# Altium PCB rpi-can-hat.PcbDoc
Units mil, origin at the board's own origin, x right, y up, seen from the top; angles counter-clockwise.
Board outline 2559.06 x 1885.67 mil, 2 copper layers (Top Layer, Bottom Layer); 25 components, 28 nets, 131 pads, 11 vias.
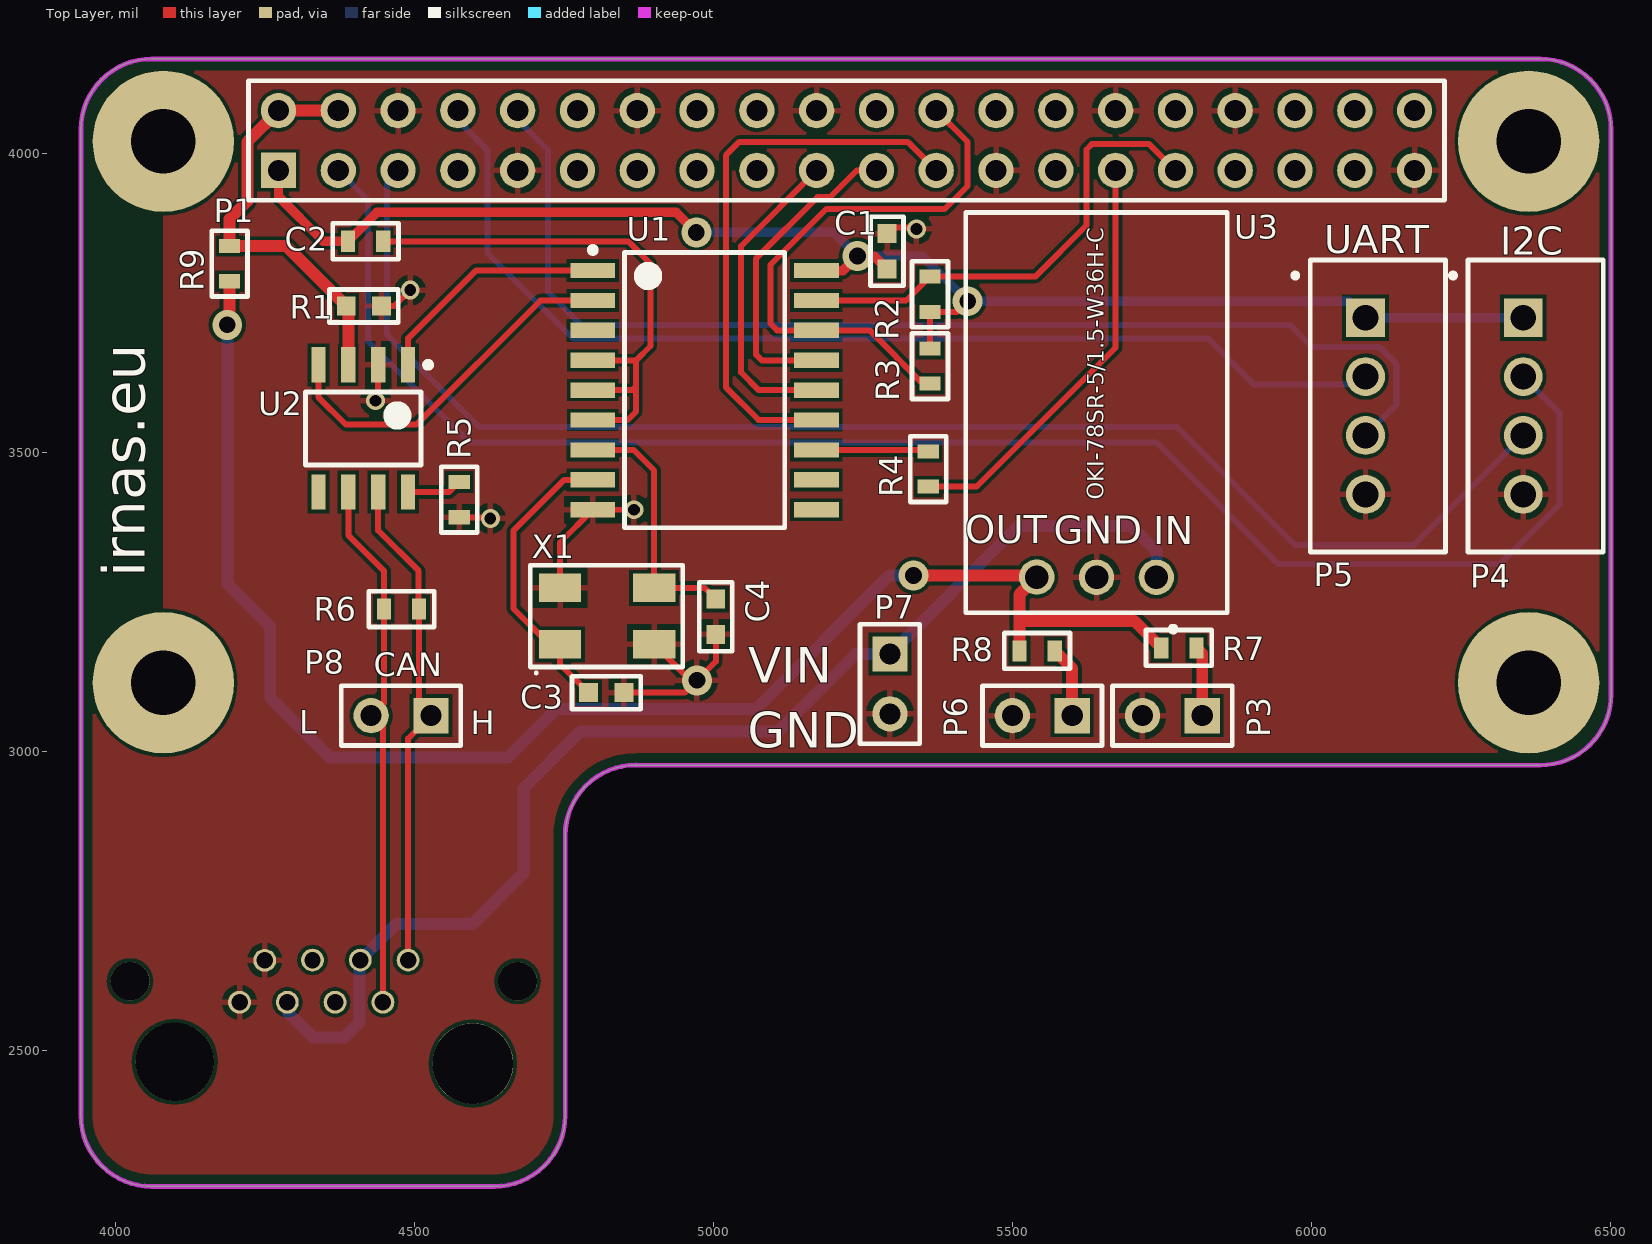
[diagram p0: Top Layer view]
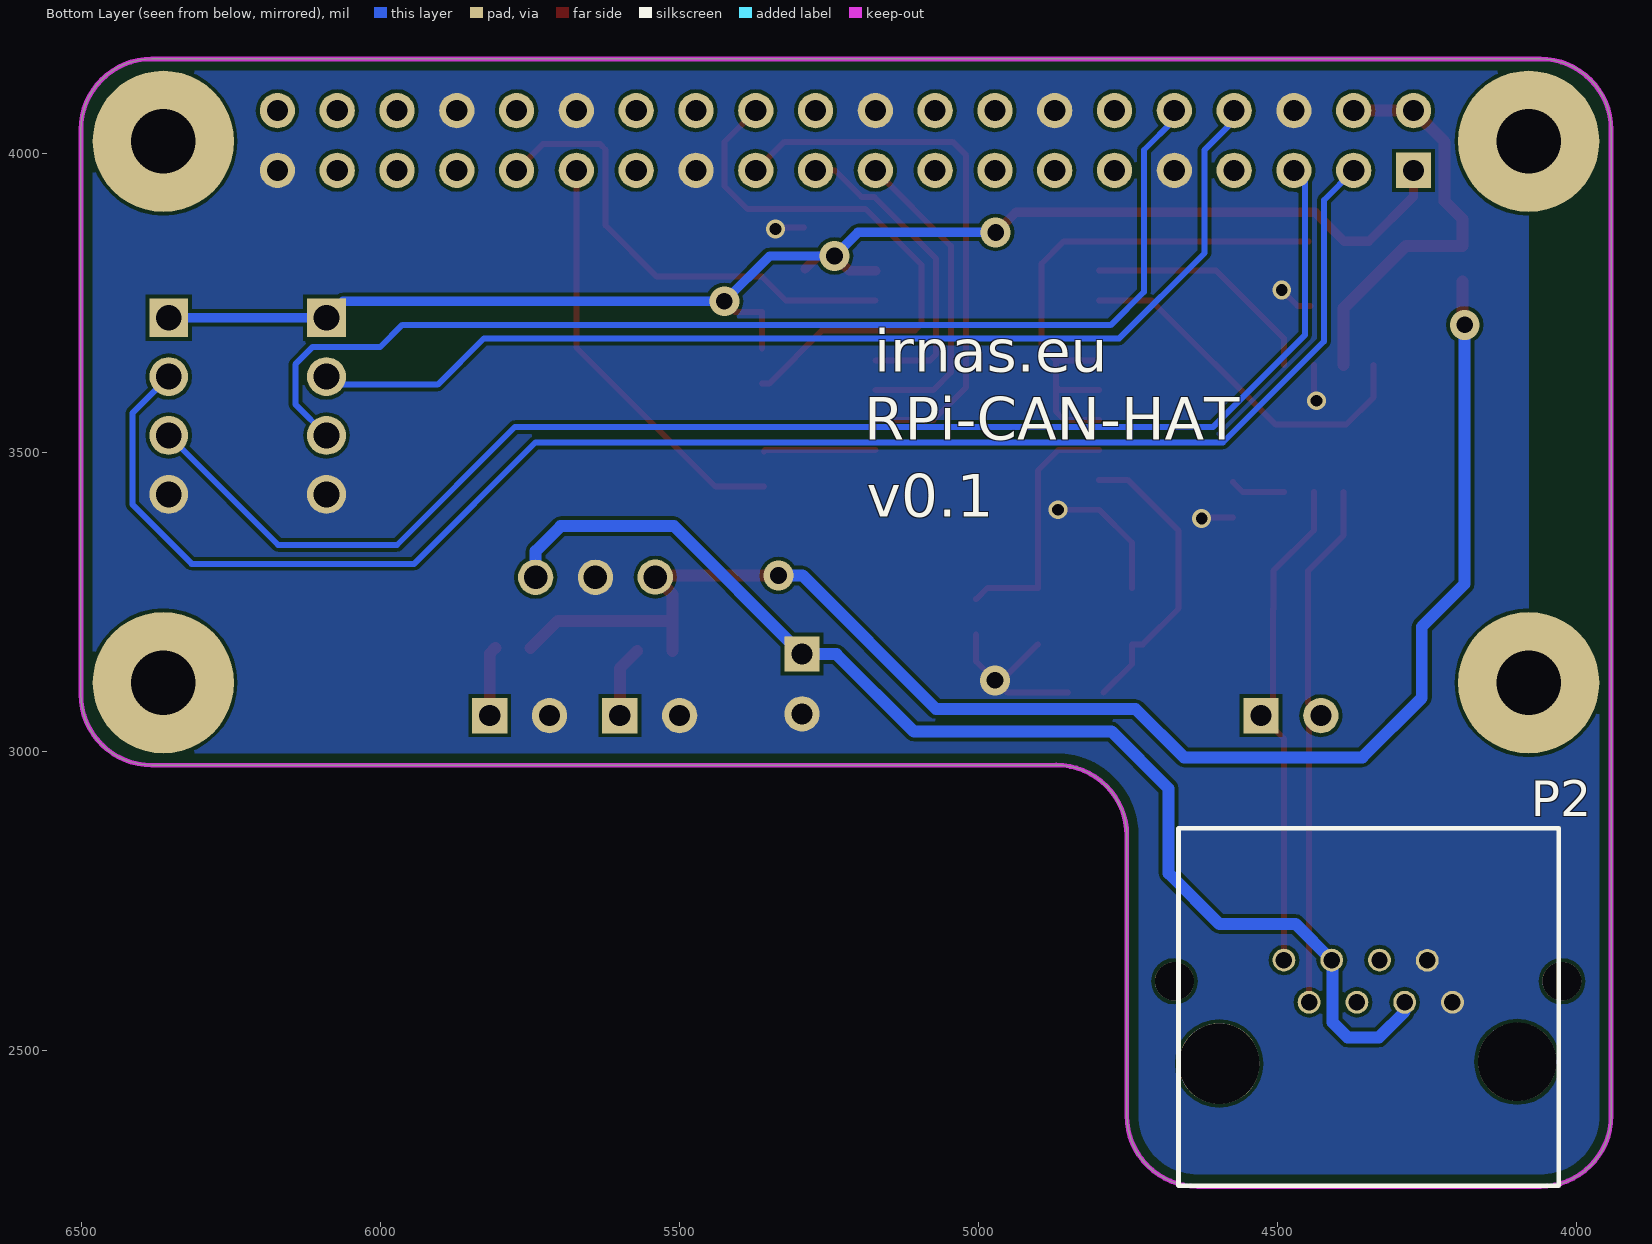
[diagram p1: Bottom Layer view, seen from below]
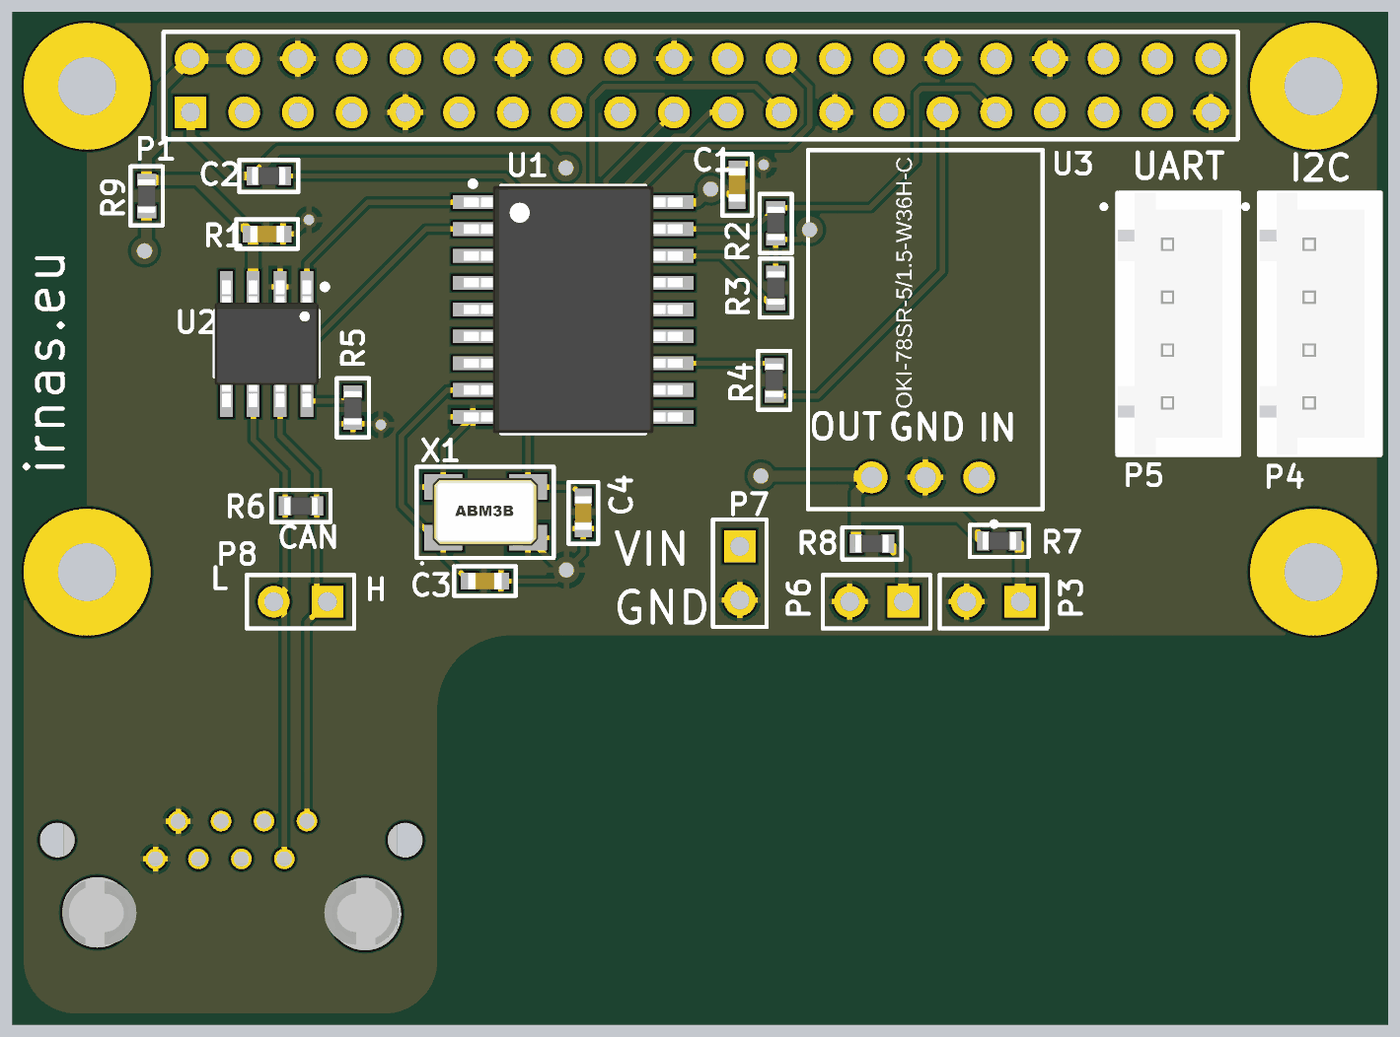
[diagram p2: 3D render of the assembled board from above, using the file's embedded part models]

## Layer stack, top to bottom
Top Solder: solder mask 0.4, Solder Resist, Dk 3.5
Top Layer: signal copper 1.4
Dielectric 1: dielectric 12.6, FR-4, Dk 4.8
Bottom Layer: signal copper 1.4
Bottom Solder: solder mask 0.4, Solder Resist, Dk 3.5

## Board outline
3942.2,2390.75 ccw(c4060.31,2390.75) 4060.31,2272.64 4633.86,2272.64 ccw(c4633.86,2390.75) 4751.97,2390.75 4751.97,2859.25 cw(c4870.08,2859.25) 4870.08,2977.36 4870.08,2977.2 6383.15,2977.2 ccw(c6383.15,3095.32) 6501.26,3095.32 6501.26,4040.2 ccw(c6383.15,4040.2) 6383.15,4158.31 4060.31,4158.31 ccw(c4060.31,4040.2) 3942.2,4040.2

## Design rules (kind name [scope] priority, off if disabled: settings)
BoardOutlineClearance [All] p1: gap=10 ignorepadtopadclearanceinfootprint=FALSE except(0: Arc-SplitContinuation Track-SplitContinuation SMDPad-SplitContinuation THPad-SplitContinuation Via-SplitContinuation Fill-SplitContinuation Poly-SplitContinuation Region-SplitContinuation Text-SplitContinuation; 19.68: Poly-OutlineEdge)
Clearance [All] p1: gap=6 ignorepadtopadclearanceinfootprint=FALSE
ComponentClearance [All] p1: gap=0.79 collisioncheckmode=3 verticalgap=10 showdistances=FALSE
HoleSize [All] p1: absolutevalues=TRUE maxlimit=196.85 minlimit=1 maxpercent=80.000 minpercent=20.000
PlaneConnect [All] p1: planeconnectstyle=Direct reliefexpansion=20 reliefentries=4 reliefconductorwidth=10 reliefairgap=10
PolygonConnect "PolygonConnect t" [All vs OnLayer('Top Layer')] p1: connectstyle=Relief reliefconductorwidth=10 reliefentries=4 polygonreliefangle="90 Angle" airgapwidth=10
PolygonConnect "PolygonConnect b" [All vs OnLayer('Bottom Layer')] p2: connectstyle=Direct reliefconductorwidth=10 reliefentries=4 polygonreliefangle="90 Angle" airgapwidth=10
RoutingVias [All] p1: holewidth=28 width=50 viastyle="Through Hole" minholewidth=28 minwidth=50 maxholewidth=28 maxwidth=50
SolderMaskExpansion [All] p1: expansion=4
Width [All] p1: maxlimit=30 minlimit=10 preferedwidth=10 minimp=50.000000 maximp=50.000000 favimp=50.000000
27 further rules are at their usual default settings.

## Components (designator, comment, footprint, x,y, rotation, side; value= is the part's Value field where it differs from the comment)
C1 "100nF" CAP0603 5290.35,3836.61 r90 top
C2 "100nF" CAP0603 4415.35,3745.08 r0 top
C3 "20pF" CAP0603 4820.87,3098.43 r180 top
C4 "20pF" CAP0603 5003.94,3225.39 r90 top
P1 "Header 20X2" HDR2X20 4272.64,3971.85 r0 top
P2 "RJ45" "EThernet conn" 4489.37,2477.56 r180 bottom
P3 "Header 2" HDR1X2 5817.52,3060.04 r180 top
P4 "JST-xH" JST-xH 6357.4,3579.09 r270 top
P5 "JST-xH" JST-xH 6093.62,3579.09 r270 top
P6 "Header 2" HDR1X2 5600,3060.04 r180 top
P7 "Header 2" HDR1X2 5295.28,3162.99 r270 top
P8 "Header 2" HDR1X2 4527.56,3060.04 r180 top
R1 "100k" RES0603 4418.31,3853.35 r180 top
R2 "100k" RES0603 5362.2,3764.76 r270 top
R3 "100k" RES0603 5362.2,3644.68 r90 top
R4 "0R" RES0603 5359.25,3472.44 r270 top
R5 "10R" RES0603 4574.8,3421.26 r90 top
R6 "120R" RES0603 4478.35,3238.19 r0 top
R7 "0R" RES0603 5778.54,3173.23 r0 top
R8 "0R" RES0603 5541.34,3168.31 r0 top
R9 "0R" RES0603 4190.94,3815.94 r90 top
U1 "MCP2515" SOIC127P1030X264-18N 4985.24,3604.33 r0 top
U2 "MCP2551" SOIC127P600X175-8N 4414.37,3540.35 r270 top
U3 "OKI-78SR-5" DC-DC 5642.72,3862.2 r0 top
X1 "8MHz" DFN-Crystal 4827.76,3220.47 r0 top

## Footprints (in the part's own frame and the unit in brackets; to place one, negate y for a bottom-side part, rotate by r counter-clockwise, add the part's x,y. Pads: shape width x height; smd on the part's side, far side on the other; paste and mask are expansions set on the pad)
CAP0603 [mm]
  rect 0.8x0.8 smd: 1(-0.75,0) 2(0.75,0)
  silkscreen extent -1.46,-0.7 1.46,0.7, body extent -0.8,-0.4 0.8,0.4, height 0.9
DC-DC [mm]
  round 1.501 hole 1: 1(2.49,-14.5) 2(-0.05,-14.5)
  round 1.5 hole 1: 3(-2.59,-14.49)
  silkscreen extent -5.6,-16.8 5.5,1, body extent -5.6,-15.98 5.49,0.96, height 7.6
DFN-Crystal [mm] "DFN, 4-Leads, Body 3.20x5.00mm, Pitch 4.00mm, IPC Medium Density"
  rect 1.8x1.2 smd: 1(-2.14,-1.048) 2(1.86,-1.048) 3(1.86,1.352) 4(-2.14,1.352)
  silkscreen extent -3.4,-2.31 3.07,2.31, body extent -2.66,-1.43 2.34,1.77, height 1.1
"EThernet conn" [mm]
  round 0.97 hole 0.7: 1(0,4.41) 2(1.07,2.62) 3(2.03,4.41) 4(3.1,2.62) 5(4.06,4.41) 6(5.13,2.62) 7(6.09,4.4) 8(7.16,2.62)
  round 1.65 hole 1.65 unplated: ""(-4.65,3.51) ""(11.81,3.51)
  round 3.43 hole 3.43 unplated: ""(-2.75,0.01)
  round 3.33 hole 3.33 unplated: ""(9.91,0.09)
  silkscreen extent -4.48,-5.17 11.67,10.01, body extent -4.32,-5.02 11.56,10.09, height 13.21
HDR1X2 [mm] "Connector; Header; 2 Position"
  rect 1.5x1.5 hole 0.9: 1(0,0)
  round 1.5 hole 0.9: 2(2.54,0)
  silkscreen extent -1.27,-1.27 3.81,1.27
HDR2X20 [mm] "Connector; Header; 20x2 Position"
  rect 1.5x1.5 hole 0.9: 1(0,0)
  round 1.5 hole 0.9: 2(0,2.54) 3(2.54,0) 4(2.54,2.54) 5(5.08,0) 6(5.08,2.54) 7(7.62,0) 8(7.62,2.54) 9(10.16,0) 10(10.16,2.54) 11(12.7,0) 12(12.7,2.54) 13(15.24,0) 14(15.24,2.54) 15(17.78,0) 16(17.78,2.54) 17(20.32,0) 18(20.32,2.54) 19(22.86,0) 20(22.86,2.54) 21(25.4,0) 22(25.4,2.54) 23(27.94,0) 24(27.94,2.54) 25(30.48,0) 26(30.48,2.54) 27(33.02,0) 28(33.02,2.54) 29(35.56,0) 30(35.56,2.54) 31(38.1,0) 32(38.1,2.54) 33(40.64,0) 34(40.64,2.54) 35(43.18,0) 36(43.18,2.54) 37(45.72,0) 38(45.72,2.54) 39(48.26,0) 40(48.26,2.54)
  silkscreen extent -1.27,-1.27 49.53,3.81
JST-xH [mm]
  rect 1.65x1.65 / inner round 1.65 / far side rect 1.65x1.65 hole 1.1: 1(-3.716,-0.078)
  round 1.65 hole 1.1: 2(-1.216,-0.078) 3(1.284,-0.078) 4(3.784,-0.078)
  silkscreen extent -6.17,-3.14 6.23,3.32, body extent -6.17,-2.4 6.23,3.35, height 7
RES0603 [mm]
  rect 0.6x0.9 smd: 1(-0.75,0) 2(0.75,0)
  silkscreen extent -1.4,-0.76 1.4,0.76, body extent -0.8,-0.42 0.8,0.42, height 0.8
SOIC127P600X175-8N [mm] "SOIC, 8-Leads, Body 4.90x3.90mm, Pitch 1.27mm, IPC Medium Density"
  rect 1.5x0.6 smd: 1(-2.7,1.905) 2(-2.7,0.635) 3(-2.7,-0.635) 4(-2.7,-1.905) 5(2.7,-1.905) 6(2.7,-0.635) 7(2.7,0.635) 8(2.7,1.905)
  silkscreen extent -2.82,-2.45 1.55,2.88, body extent -3,-2.45 3,2.45, height 1.75
SOIC127P1030X264-18N [mm] "SOIC, 18-Leads, Body 11.53x7.49mm, Pitch 1.27mm, IPC Medium Density"
  rect 1.9x0.65 smd: 1(-4.75,5.08) 2(-4.75,3.81) 3(-4.75,2.54) 4(-4.75,1.27) 5(-4.75,0) 6(-4.75,-1.27) 7(-4.75,-2.54) 8(-4.75,-3.81) 9(-4.75,-5.08) 10(4.75,-5.08) 11(4.75,-3.81) 12(4.75,-2.54) 13(4.75,-1.27) 14(4.75,0) 15(4.75,1.27) 16(4.75,2.54) 17(4.75,3.81) 18(4.75,5.08)
  silkscreen extent -4.87,-5.85 3.4,6.08, body extent -5.17,-5.85 5.17,5.85, height 2.64

## Part data
C1 C2: "MURATA - GRM188R71C104KA01J - CAP, MLCC, X7R, 0.1UF, 16V, 0603", Capacitance=0.1, Capacitance Tolerance="± 10%", Ceramic Capacitor Case="0603 [1608 Metric]", Dielectric Characteristic=X7, Manufacturer=MURATA, Manufacturer Part Number=GRM188R71C104KA01J, Operating Temperature Max=125, Operating Temperature Min=-55, Supplier Part Number 1=2688519, Voltage Rating=16, Automotive Qualification Standard=-, ComponentLink1Description=http://www.farnell.com/datasheets/2189124.pdf, ComponentLink1URL=http://www.farnell.com/datasheets/2189124.pdf, MSL="MSL 1 - Unlimited", Packaging="Cut Tape", Pricing 1="10=0.0145, 100=0.0126, 500=0.0081, 2500=0.0059, 5000=0.0052, 10000=0.0046, 50000=0.0036, 100000=0.0035 (GBP)", Product Range="GRM Series", RoHS=YES, Stock 1=18297, Supplier 1=Farnell, SVHC="No SVHC (20-Jun-2016"
C3 C4: "MURATA - GRM1885C1H200JA01D - CAPACITOR, MLCC, C0G, 20PF, 50V, 0603", Capacitance=20, Capacitance Tolerance="± 5%", Ceramic Capacitor Case="0603 [1608 Metric]", Dielectric Characteristic="C0G / NP0", Manufacturer=MURATA, Manufacturer Part Number=GRM1885C1H200JA01D, Operating Temperature Max=125, Operating Temperature Min=-55, Supplier Part Number 1=2456108, Voltage Rating=50, Automotive Qualification Standard=-, ComponentLink1Description=http://www.farnell.com/datasheets/2048077.pdf, ComponentLink1URL=http://www.farnell.com/datasheets/2048077.pdf, MSL="MSL 1 - Unlimited", Packaging="Cut Tape", Pricing 1="10=0.0245, 100=0.0159, 500=0.0123, 1000=0.0095, 2000=0.0093, 4000=0.0073, 20000=0.0062, 40000=0.0057 (GBP)", Product Range="GRM Series", RoHS=YES, Stock 1=5812, Supplier 1=Farnell, SVHC="No SVHC (17-Dec-2015"
P1: "Header, 20-Pin, Dual row", LatestRevisionDate=17-Jul-2002, LatestRevisionNote="Re-released for DXP Platform.", Publisher="Altium Limited"
P2: library part 44620-0001, "MODULAR JACK", Manufacturer=Molex, Supplier Part Number 1=2782009, Body Orientation="Right Angle", Category="Connector Telephone and Telecom", ComponentLink1Description=https://datasheet.ciiva.com/26929/getdatasheetpartid-767379-26929525.pdf, ComponentLink1URL=https://datasheet.ciiva.com/26929/getdatasheetpartid-767379-26929525.pdf, ComponentLink2Description=https://datasheet.ciiva.com/19472/2040276-19472615.pdf, ComponentLink2URL=https://datasheet.ciiva.com/19472/2040276-19472615.pdf, ComponentLink3Description=https://datasheet.ciiva.com/30213/71510446200001-modular-jacks-plug-30213975.pdf, ComponentLink3URL=https://datasheet.ciiva.com/30213/71510446200001-modular-jacks-plug-30213975.pdf, ComponentLink4Description=https://datasheet.ciiva.com/4562/0446200001-modular-jacks-plug-145952-4562632.pdf, ComponentLink4URL=https://datasheet.ciiva.com/4562/0446200001-modular-jacks-plug-145952-4562632.pdf, ComponentLink5Description=https://datasheet.ciiva.com/16074/832720446200001-modular-jacks-plug-16074650.pdf, ComponentLink5URL=https://datasheet.ciiva.com/16074/832720446200001-modular-jacks-plug-16074650.pdf, ComponentLink6Description=https://datasheet.ciiva.com/1107/66995-1107778.pdf, ComponentLink6URL=https://datasheet.ciiva.com/1107/66995-1107778.pdf, ComponentLink7Description=https://datasheet.ciiva.com/9393/0446200001-modular-jacks-plug-9393019.pdf, ComponentLink7URL=https://datasheet.ciiva.com/9393/0446200001-modular-jacks-plug-9393019.pdf, ComponentLink8Description=https://datasheet.ciiva.com/16649/0446200001-modular-jacks-plug-16649582.pdf, ComponentLink8URL=https://datasheet.ciiva.com/16649/0446200001-modular-jacks-plug-16649582.pdf, Gender=RCP, Manufacturer Part Number=44620-0001, Mounting="Through Hole", Number of Contacts=8, Pitch="2.04 mm", Pricing 1="1=0.689, 50=0.675, 100=0.67, 250=0.669, 500=0.668, 1000=0.667 (EUR)", Rad Hard=No, Stock 1=1202, Supplier 1=Farnell, Termination Method=Solder, Type=RJ-45
P3 P6 P7 P8: "Header, 2-Pin", LatestRevisionDate=17-Jul-2002, LatestRevisionNote="Re-released for DXP Platform.", Publisher="Altium Limited"
P4 P5: library part B4B-XH-A(LF)(SN), "4 Positions Header, Shrouded Connector 0.098\" (2.50mm) Through Hole Tin", Color=Natural, Current Rating="3 A", Insulation Resistance="1000 MO", Manufacturer=JST, Operating Temp Range="-25 to +85 °C", Supplier Part Number 1=1516278, Voltage Rating="250 V", ComponentLink1Description=https://datasheet.ciiva.com/26894/getdatasheetpartid-455616-26894787.pdf, ComponentLink1URL=https://datasheet.ciiva.com/26894/getdatasheetpartid-455616-26894787.pdf, ComponentLink2Description=https://datasheet.ciiva.com/26924/getdatasheetpartid-640571-26924035.pdf, ComponentLink2URL=https://datasheet.ciiva.com/26924/getdatasheetpartid-640571-26924035.pdf, ComponentLink3Description=https://datasheet.ciiva.com/16203/b4b-xh-alfsn-16203642.pdf, ComponentLink3URL=https://datasheet.ciiva.com/16203/b4b-xh-alfsn-16203642.pdf, ComponentLink4Description=https://datasheet.ciiva.com/726/exh-726404.pdf, ComponentLink4URL=https://datasheet.ciiva.com/726/exh-726404.pdf, Contact Material=Brass, Contact Plating=Tin, Gender=Male, Manufacturer Part Number=B4B-XH-A(LF)(SN), Material=Polyamide, Mating Type="Detent Lock", No of Positions=4, No of Rows=1, Pitch="2.5 mm", Stock 1=0, Style/Orientation="Straight Header/Plug", Supplier 1=Farnell, Termination=Crimp, Type="Shrouded Header"
R1 R2 R3: "MULTICOMP - MCMR06X104 JTL - RES, CERAMIC, 100K, 5%, 0.1W, 0603", Manufacturer=MULTICOMP, Manufacturer Part Number="MCMR06X104 JTL", Power Rating=100, Resistance Tolerance="± 5%", Resistor Case Style="0603 [1608 Metric]", Resistor Element Material=Ceramic, Resistor Mounting="Surface Mount Device<!--FANDB--><div class=\"features-and-benefits-container\"><div class=\"features-and-benefits-description\"><span class=\"features-benefits-value\">The Multicomp MCMR series resistors are automotive grade, anti sulphured thick film chip resistor. The resistance range includes E24 and E96 decade values from 1ohm to 10Mohm. These resistors are constructed on top of a high grade ceramic body.</span></div><div class=\"features-and-benefits-list\"><ul class=\"features-and-benefits-list-list\"><li class=\"features-and-benefits-list-item\">EIA 0402, 0603, 0805, 1206 chip sizes available</li><li class=\"features-and-benefits-list-item\">High reliability and stability</li><li class=\"features-and-benefits-list-item\">Automotive grade AEC-Q200 compliant</li><li class=\"features-and-benefits-list-item\">Complaint with (IEC 60068-1) 55/155/56 climatic category</li><li class=\"features-and-benefits-list-item\">Maximum operation voltage of 50V, 75V, 150V and 200V</li><li class=\"features-and-benefits-list-item\">Power rating of 62.5mW, 100mW, 125mW and 250mW</li><li class=\"features-and-benefits-list-item\">Available in ±1% and ±5% tolerance</li><li class=\"features-and-benefits-list-item\">Temperature coefficient (TCR) of +200ppm/°C, +100ppm/°C and -200ppm/°C to +400ppm/°C</li><li class=\"features-and-benefits-list-item\">Operating temperature range -55°C to 155", Supplier Part Number 1=2073357, Temperature Coefficient="± 100", Voltage Rating=75, Automotive Qualification Standard=-, ComponentLink1Description=http://www.farnell.com/datasheets/1716707.pdf, ComponentLink1URL=http://www.farnell.com/datasheets/1716707.pdf, Packaging="Cut Tape", Pricing 1="10=0.0109, 100=0.0085, 500=0.006, 1000=0.0048, 2500=0.004, 5000=0.003, 25000=0.002, 50000=0.0016 (GBP)", Product Range="MCMR Series", Resistance=100, RoHS=Y-EX, Stock 1=187, Supplier 1=Farnell
R4 R7 R8 R9: "BOURNS - CR0603-J/-000ELF - RES, THICK FILM, 0R, 5%, 0.1W, 0603", Manufacturer=BOURNS, Manufacturer Part Number=CR0603-J/-000ELF, Power Rating=100, Resistance=0, Resistance Tolerance="± 5%", Resistor Case Style="0603 [1608 Metric]", Resistor Element Material="Thick Film", Resistor Mounting="Surface Mount Device<!--FANDB--><div class=\"features-and-benefits-container\"><div class=\"features-and-benefits-description\"><span class=\"features-benefits-value\">The Bourns CR series are standard thick film chip resistors. These resistors provide flexibility of performance, space saving and low cost. The Resistance range includes E96 and E24 decade values from 1ohm to 10Mohm.</span></div><div class=\"features-and-benefits-list\"><ul class=\"features-and-benefits-list-list\"><li class=\"features-and-benefits-list-item\">0201, 0402, 0603, 0805, 1206, 1210, 2010, 2512 standard case sizes available</li><li class=\"features-and-benefits-list-item\">±1% and ±5% tolerance</li><li class=\"features-and-benefits-list-item\">±100ppm/°C, ±200ppm/°C and ±250ppm/°C TCR values available</li><li class=\"features-and-benefits-list-item\">Power rating selectable for 50mW, 63mW, 0.1W, 0.125W, 0.25W, 0.5W and 1W based on ordering</li><li class=\"features-and-benefits-list-item\">Jumpers are available for all size</li><li class=\"features-and-benefits-list-item\">3 layer termination process with nickel barrier prevents leaching & provides excellent solderability</li><li class=\"features-and-benefits-list-item\">Suitable for all type of soldering processes</li><li class=\"features-and-benefits-list-item\">Tight dimensional tolerances</li><li class=\"features-and-benefits-list-item\">Maximum working voltage depends on case size</li><li class=\"features-and-benefits-list-item\">Operating temperature of -55°C to +125°C(CR0201) and -55°C to +155", Supplier Part Number 1=2008343, Temperature Coefficient=-, Voltage Rating=50, Automotive Qualification Standard=-, ComponentLink1Description=http://www.bourns.com/engineering/CHPREZTR/cr0603.stp, ComponentLink1URL=http://www.bourns.com/engineering/CHPREZTR/cr0603.stp, ComponentLink2Description=http://www.farnell.com/datasheets/2178762.pdf, ComponentLink2URL=http://www.farnell.com/datasheets/2178762.pdf, MSL="MSL 1 - Unlimited", Packaging="Cut Tape", Pricing 1="10=0.0146, 250=0.0097, 1000=0.0073, 5000=0.0049, 12500=0.0042 (GBP)", Product Range="CR Series", RoHS=YES, Stock 1=58200, Supplier 1=Farnell, SVHC="No SVHC (17-Dec-2015)"
R5: "VISHAY - RCA060310R0FKEA - RES, AUTO, THICK FILM, 10R, 1%, 0603", Manufacturer=VISHAY, Manufacturer Part Number=RCA060310R0FKEA, Power Rating=100, Resistance=10, Resistance Tolerance="± 1%", Resistor Case Style="0603 [1608 Metric]", Resistor Element Material="Thick Film", Supplier Part Number 1=2616585, Temperature Coefficient="± 100", Voltage Rating=75, Automotive Qualification Standard=AEC-Q200, ComponentLink1Description=http://www.farnell.com/datasheets/2111201.pdf, ComponentLink1URL=http://www.farnell.com/datasheets/2111201.pdf, Packaging="Cut Tape", Pricing 1="10=0.0803, 100=0.0386, 500=0.0235, 2500=0.015, 5000=0.0135, 10000=0.0108, 50000=0.0068, 100000=0.0067 (GBP)", Product Range="RCA Series", RoHS=YES, Stock 1=9559, Supplier 1=Farnell, SVHC="No SVHC (17-Dec-2015)<!--FANDB--><div class=\"features-and-benefits-container\"><div class=\"features-and-benefits-description\"><span class=\"features-benefits-value\">The RCA series from Vishay are automotive grade, sulphur resistant thick film rectangular chip resistors. The resistance range includes E24 and E96 decade values from 1ohm to 10Mohm. They provide superior resistance against H2S atmosphere. These resistors have metal glaze on high quality ceramic.</span></div><div class=\"features-and-benefits-list\"><ul class=\"features-and-benefits-list-list\"><li class=\"features-and-benefits-list-item\">Automotive grade AEC-Q200 qualified (rev C)</li><li class=\"features-and-benefits-list-item\">EIA 0402, 0603, 0805, 1206, 1210, 1218, 2010 and 2512 case sizes available</li><li class=\"features-and-benefits-list-item\">Available in ±0.5%, ±1% and ±5% tolerances</li><li class=\"features-and-benefits-list-item\">Jumpers are also available</li><li class=\"features-and-benefits-list-item\">±50ppm/K, ±100ppm/K and ±200ppm/K TCR values</li><li class=\"features-and-benefits-list-item\">Power rating of 0.063W, 0.10W, 0.125W, 0.25W, 0.5W, 0.75W and 1W at 70?C</li><li class=\"features-and-benefits-list-item\">Available in 50V, 75V, 150V, 200V, 400V and 500V limiting voltage options</li><li class=\"features-and-benefits-list-item\">Category temperature range from -55?C to 155?C</li><li class=\"features-and-benefits-list-item\">Stability ?R/R = 1 % for 1000h at 70"
R6: "RES SMD 120 OHM 1% 1/4W 0603", Case/Package=0603, Case Code (Metric)=1608, Manufacturer=Vishay, Manufacturer Part Number=CRCW0603120RFKEAHP, Max Operating Temperature=155°C, Max Power Dissipation=250mW, Min Operating Temperature=-55°C, Package Quantity=5000, Supplier Part Number 1=1738892, Temperature Coefficient=100ppm/°C, Tolerance=1%, Voltage Rating=75V, Case Code (Imperial)=0603, ComponentLink1Description=https://datasheet.ciiva.com/5852/424479-5852064.pdf, ComponentLink1URL=https://datasheet.ciiva.com/5852/424479-5852064.pdf, ComponentLink2Description=https://datasheet.ciiva.com/2578/crcwhpe3-2578529.pdf, ComponentLink2URL=https://datasheet.ciiva.com/2578/crcwhpe3-2578529.pdf, ComponentLink3Description=https://datasheet.ciiva.com/8975/crcwhpe3-8975275.pdf, ComponentLink3URL=https://datasheet.ciiva.com/8975/crcwhpe3-8975275.pdf, ComponentLink4Description=https://datasheet.ciiva.com/7777/424479-7777277.pdf, ComponentLink4URL=https://datasheet.ciiva.com/7777/424479-7777277.pdf, ComponentLink5Description=https://datasheet.ciiva.com/7777/424479-7777278.pdf, ComponentLink5URL=https://datasheet.ciiva.com/7777/424479-7777278.pdf, Composition="Thick Film", Contact Plating=Tin, Depth=0.85mm, Features="Automotive AEC-Q200", Height=0.022inch, Length=1.6mm, Military Standard=Not, Number of Terminations=2, Packaging="Tape and Reel", Power Rating=250mW, Pricing 1="10=0.141, 100=0.0937, 500=0.0669, 1000=0.0453 (EUR)", Radiation Hardening=No, REACH SVHC=Unknown, Resistance=120R, Stock 1=34760, Supplier 1=Farnell, Termination=SMD/SMT, Width=0.033inch
U1: library part MCP2515-I/SO, "MICROCHIP         MCP2515-I/SO             CAN Bus, Controller, SPI, 3, 2, 2.7 V, 5.5 V, SOIC", Case/Package=SOIC, Frequency=40MHz, Manufacturer=Microchip, Max Operating Temperature=85°C, Max Supply Current=10mA, Max Supply Voltage=5.5V, Min Operating Temperature=-40°C, Min Supply Voltage=2.7V, Operating Supply Voltage=5V, Supplier Part Number 1=1292239, ComponentLink1Description=https://datasheet.ciiva.com/14152/ea644222-e-14152533.pdf, ComponentLink1URL=https://datasheet.ciiva.com/14152/ea644222-e-14152533.pdf, ComponentLink2Description=https://datasheet.ciiva.com/15150/getdatasheetpartid-446809-15150054.pdf, ComponentLink2URL=https://datasheet.ciiva.com/15150/getdatasheetpartid-446809-15150054.pdf, ComponentLink3Description=https://datasheet.ciiva.com/16205/filehandler-aspxddocname-en011733-16205222.pdf, ComponentLink3URL=https://datasheet.ciiva.com/16205/filehandler-aspxddocname-en011733-16205222.pdf, ComponentLink4Description=https://datasheet.ciiva.com/18405/70045398-18405546.pdf, ComponentLink4URL=https://datasheet.ciiva.com/18405/70045398-18405546.pdf, ComponentLink5Description=https://datasheet.ciiva.com/1495/1669372-1495083.pdf, ComponentLink5URL=https://datasheet.ciiva.com/1495/1669372-1495083.pdf, ComponentLink6Description=https://datasheet.ciiva.com/1695/21801g-1695405.pdf, ComponentLink6URL=https://datasheet.ciiva.com/1695/21801g-1695405.pdf, ComponentLink7Description=https://datasheet.ciiva.com/29305/651448-da-01-en-ic-can-cont-mcp2515-i-so-soic-18-mcp-29305158.pdf, ComponentLink7URL=https://datasheet.ciiva.com/29305/651448-da-01-en-ic-can-cont-mcp2515-i-so-soic-18-mcp-29305158.pdf, Contact Plating=Tin,Matte, Data Rate=1Mbps, Height=2.31mm, Interface=SPI,CAN, Lead Free="Lead Free", Length=11.53mm, Manufacturer Part Number=MCP2515-I/SO, Mount="Surface Mount", Nominal Supply Current=10mA, Number of Drivers=1, Number of Pins=18, Number of Receive Buffers=2, Number of Receivers=1, Number of Transceivers=1, Number of Transmit Buffers=3, Packaging=Rail/Tube, Pricing 1="1=1.4, 10=1.29, 25=1.17, 100=1.06 (GBP)", Radiation Hardening=No, REACH SVHC="No SVHC", Stock 1=2836, Supplier 1=Farnell, Width=7.49mm
U2: library part MCP2551-I/SN, "MICROCHIP         MCP2551-I/SN             CAN Bus, Transceiver, CAN, 1, 1, 4.5 V, 5.5 V, SOIC", Case/Package=SOIC, Manufacturer=Microchip, Max Operating Temperature=85°C, Max Supply Current=75mA, Max Supply Voltage=5.5V, Min Operating Temperature=-40°C, Min Supply Voltage=4.5V, Operating Supply Voltage=5V, Package Quantity=100, Supplier Part Number 1=9758569, ComponentLink1Description=https://datasheet.ciiva.com/8084/jp011797-8084592.pdf, ComponentLink1URL=https://datasheet.ciiva.com/8084/jp011797-8084592.pdf, ComponentLink2Description=https://datasheet.ciiva.com/27056/2040583-27056423.pdf, ComponentLink2URL=https://datasheet.ciiva.com/27056/2040583-27056423.pdf, ComponentLink3Description=https://datasheet.ciiva.com/1495/21667f-1495089.pdf, ComponentLink3URL=https://datasheet.ciiva.com/1495/21667f-1495089.pdf, ComponentLink4Description=https://datasheet.ciiva.com/1700/21667f-1700023.pdf, ComponentLink4URL=https://datasheet.ciiva.com/1700/21667f-1700023.pdf, ComponentLink5Description=https://datasheet.ciiva.com/14152/eb644223-644224-e-14152540.pdf, ComponentLink5URL=https://datasheet.ciiva.com/14152/eb644223-644224-e-14152540.pdf, ComponentLink6Description=https://datasheet.ciiva.com/17649/jp011797-17649039.pdf, ComponentLink6URL=https://datasheet.ciiva.com/17649/jp011797-17649039.pdf, Contact Plating=Tin,Matte, Data Rate=1Mbps, Height=1.25mm, Interface=CAN, Lead Free="Lead Free", Length=4.9mm, Logic Function=Transceiver, Manufacturer Part Number=MCP2551-I/SN, Mount="Surface Mount", Nominal Supply Current=75mA, Number of Drivers=1, Number of Pins=8, Number of Receive Buffers=1, Number of Receivers=1, Number of Terminals=8, Number of Transceivers=1, Number of Transmit Buffers=1, Packaging=Rail/Tube, Pricing 1="1=0.79, 10=0.723, 25=0.656, 100=0.602 (GBP)", Radiation Hardening=No, REACH SVHC="No SVHC", Slew Rate=8.5V/µs, Stock 1=28021, Supplier 1=Farnell, Width=3.9mm
U3: library part OKI-78SR-5/1.5-W36-C, "Non-Isolated DC/DC Converters 7.5W 24Vin 5Vout1 1.5A SIP Non-Iso", Current - Output (Max)=1.5A, Manufacturer=Murata, Operating Temperature="-40°C ~ 85°C", Package / Case="3-SIP Module", Power (Watts) - Manufacture Series=8W, Supplier Part Number 1=2102101, Voltage - Input (Max)=36V, Voltage - Input (Min)=7V, Voltage - Isolation=-, Voltage - Output 1=5V, Applications="ITE (Commercial)", Category="Power Supplies - Board Mount", ComponentLink1Description=https://datasheet.ciiva.com/8006/1790439-8006672.pdf, ComponentLink1URL=https://datasheet.ciiva.com/8006/1790439-8006672.pdf, ComponentLink2Description=https://datasheet.ciiva.com/2374/oki-78sr-2374163.pdf, ComponentLink2URL=https://datasheet.ciiva.com/2374/oki-78sr-2374163.pdf, ComponentLink3Description=https://datasheet.ciiva.com/8220/oki-78sr-8220327.pdf, ComponentLink3URL=https://datasheet.ciiva.com/8220/oki-78sr-8220327.pdf, ComponentLink4Description=https://datasheet.ciiva.com/4646/oki-78sr-56393-4646361.pdf, ComponentLink4URL=https://datasheet.ciiva.com/4646/oki-78sr-56393-4646361.pdf, ComponentLink5Description=https://datasheet.ciiva.com/6917/1790439-6917306.pdf, ComponentLink5URL=https://datasheet.ciiva.com/6917/1790439-6917306.pdf, ComponentLink6Description=https://datasheet.ciiva.com/17327/oki-78sr-17327359.pdf, ComponentLink6URL=https://datasheet.ciiva.com/17327/oki-78sr-17327359.pdf, Efficiency=90.5%, Family="DC DC Converters", Features=SCP, Manufacturer Part Number=OKI-78SR-5/1.5-W36-C, Mounting Type="Through Hole", Number of Outputs=1, Packaging=Tube, Power (Watts) - Max=8W, Series="Okami™ OKI-78SR", Size / Dimension="0.41\" L x 0.30\" W x 0.65\" H (10.4mm x 7.6mm x 16.5mm)", Stock 1=0, Supplier 1=Farnell, Type="Linear Regulator Replacement", Voltage - Output 2=-, Voltage - Output 3=-
X1: "8MHz ±10ppm Crystal 10pF 200 Ohm -10°C ~ 60°C  Surface Mount 4-SMD, No Lead (DFN, LCC)", ESR (Equivalent Series Resistance)="200 Ohm", Frequency Stability=±10ppm, Load Capacitance=10pF, Manufacturer=Abracon, Manufacturer Part Number=ABM3B-8.000MHZ-10-1-U-T, Operating Mode=Fundamental, Operating Temperature="-10°C ~ 60°C", Package / Case="4-SMD, No Lead (DFN, LCC)", Ratings=-, Supplier Part Number 1=2467817RL, Category="Crystals and Oscillators", ComponentLink1Description=https://datasheet.ciiva.com/855/abm3b-855873.pdf, ComponentLink1URL=https://datasheet.ciiva.com/855/abm3b-855873.pdf, ComponentLink2Description=https://datasheet.ciiva.com/855/abm3b-855874.pdf, ComponentLink2URL=https://datasheet.ciiva.com/855/abm3b-855874.pdf, ComponentLink3Description=https://datasheet.ciiva.com/855/abm3b-855875.pdf, ComponentLink3URL=https://datasheet.ciiva.com/855/abm3b-855875.pdf, ComponentLink4Description=https://datasheet.ciiva.com/16378/abm3b-16378027.pdf, ComponentLink4URL=https://datasheet.ciiva.com/16378/abm3b-16378027.pdf, ComponentLink5Description=https://datasheet.ciiva.com/3175/abm3b-3175853.pdf, ComponentLink5URL=https://datasheet.ciiva.com/3175/abm3b-3175853.pdf, Family=Crystals, Frequency=8MHz, Frequency Tolerance=±10ppm, Height="0.043\" (1.10mm)", Mounting Type="Surface Mount", Packaging="Tape & Reel (TR)", Series=ABM3B, Size / Dimension="0.197\" L x 0.126\" W (5.00mm x 3.20mm)", Stock 1=0, Supplier 1=Farnell, Type="MHz Crystal"

## Free pads (board coordinates)
  round 236.22 hole 108.27: 0(4080,3115) 0(4080,4020.51) 0(6363.46,3115) 0(6363.46,4020.51)

## Via types
v1: diameter 50, hole 28, Top Layer to Bottom Layer, tented both sides, 6 vias
v2: diameter 31.5, hole 19.68, Top Layer to Bottom Layer, tented both sides, 5 vias

## Nets (pads, with @x,y where several pads share a name; then routed paths per layer and width w, separated by ;. In a path a pad name is that pad's centre, name@x,y a point inside that pad or via, vN(x,y) a via of type N, cw(c..) or ccw(c..) an arc to the next point about the centre after c; other vN are vias at no path point)
+3V3: C1.1 P1.1 P4.1 P5.1 R1.2 R2.2 R3.2 U1.18 | length 2517.9
  Top Layer w10: R3.2 R2.2 5407.48,3735.24 v1(5425.2,3752.95)
  Top Layer w15.75: P1.1 4272.64,3928.15 4347.44,3853.35 R1.2 4437.01,3901.57 4937.99,3901.57 v1(4971.46,3868.11) ; U1.18 5216.73,3804.33 v1(5241.14,3828.74) 5268.7,3828.74 C1.1
  Bottom Layer w15.75: v1(4971.46,3868.11) 5201.77,3868.11 v1(5241.14,3828.74) 5349.41,3828.74 v1(5425.2,3752.95) 6062.99,3752.95 P5.1 P4.1
+5V: C2.1 P1.2 P1.4 R9.2 U2.3 | length 696.6
  Top Layer w20: P1.4 P1.2 4220.47,4019.68 4220.47,3920.28 4190.94,3890.75 R9.2 4285.43,3845.47 C2.1 4389.37,3741.54 U2.3
+12V: P2.3 P2.6 P7.1 U3.1 | length 2046.5
  Bottom Layer w20: P2.6 4287.4,2564.96 4330.71,2521.65 4382.87,2521.65 4408.15,2546.93 4408.15,2651.18 P2.3 4469.88,2711.61 4597.44,2711.61 4682.09,2796.26 4682.09,2937.99 4777.56,3033.46 5108.27,3033.46 5237.8,3162.99 P7.1 5509.25,3376.97 5698.82,3376.97 5740.75,3335.04 U3.1
C\S\: P1.24 R3.1 U1.16 | length 938.9
  Top Layer w10: R3.1 5350.39,3615.16 5261.22,3704.33 U1.16 5106.69,3704.33 5095.47,3715.55 5095.47,3813.98 5188.82,3907.32 5386.65,3907.32 5425.2,3945.87 5425.2,4019.29 P1.24
CAN_H: P2.1 P8.1 R6.2 U2.7 | length 834.8
  Top Layer w10: U2.7 4439.37,3369.68 4506.89,3302.17 R6.2@4506.89,3238.19 ; P2.1 4489.37,3021.85 P8.1 4507.87,3079.72 R6.2
CAN_L: P2.2 P8.2 R6.1 U2.6 | length 934.3
  Top Layer w10: U2.6 4389.37,3361.61 4448.82,3302.17 R6.1 4448.82,3081.3 P8.2@4447.24,3079.72 ; P2.2 P8.2@4447.24,3040.35 ; P8.2@4447.24,3040.35 P8.2@4447.24,3079.72 ; P8.2@4447.24,3040.35 P8.2 P8.2@4447.24,3079.72
GND: C1.2 C2.2 C3.1 C4.1 P1.6 P1.9 P1.14 P1.20 P1.25 P1.30 P1.34 P1.39 P2.7 P2.8 P3.2 P4.4 P5.4 P6.2 P7.2 R5.1 U1.9 U2.2 U3.2 X1.2 X1.4 | length 768.9
  Top Layer w10: v2(4435.04,3586.61) 4439.37,3590.94 U2.2 ; C2.2 4466.54,3745.08 v2(4493.11,3771.65) ; R5.1 4625,3391.73 v2(4626.97,3389.76) ; X1.4 4743.52,3349.62 U1.9 v2(4867.13,3404.33) ; C3.1 4951.77,3098.43 v1(4972.44,3119.09) ; X1.2 4961.13,3119.09 v1(4972.44,3119.09) ; C4.1 5003.94,3150.59 v1(4972.44,3119.09) ; C1.2@5292.32,3875.98 5337.6,3875.98 v2(5339.57,3874.02)
  Bottom Layer w10: v2@4493.11,3766.73 v2(4493.11,3771.65) ; v2@4626.97,3386.81 v2(4626.97,3389.76)
I\N\T\: P1.29 R4.2 | length 706
  Top Layer w10: R4.2 5439.96,3442.91 5672.64,3675.59 P1.29
MISO: P1.21 U1.15 | length 528.1
  Top Layer w10: U1.15 5080.91,3654.33 5070.87,3664.37 5070.87,3823.82 5174.37,3927.32 5195.54,3927.32 5240.07,3971.85 P1.21
MOSI: P1.19 U1.14 | length 528.6
  Top Layer w10: U1.14 5075.79,3604.33 5046.26,3633.86 5046.26,3845.47 P1.19
NetP3_1: P3.1 R7.2 | length 117.1
  Top Layer w20: R7.2 5817.52,3163.78 P3.1
NetP6_1: P6.1 R8.2 | length 120.3
  Top Layer w20: R8.2 5600,3139.17 P6.1
NetR4_1: R4.1 U1.12 | length 188
  Top Layer w10: U1.12 5356.89,3504.33 R4.1
NetR5_2: R5.2 U2.8 | length 92.4
  Top Layer w10: U2.8 4558.07,3434.06 R5.2
NetR7_1: R7.1 R8.1 R9.1 U3.3 | length 2569.7
  Top Layer w20: v1(4187.01,3713.58) 4190.94,3717.52 R9.1 ; v1(5334.65,3294.29) 5538.19,3294.29 U3.3 5511.81,3262.8 5511.81,3218.5 ; R8.1 5511.81,3218.5 ; R7.1 5703.74,3218.5 5511.81,3218.5
  Bottom Layer w20: v1(4187.01,3713.58) 4187.01,3280.51 4258.86,3208.66 4258.86,3089.57 4358.27,2990.16 4656.5,2990.16 4737.2,3070.87 5070.87,3070.87 5294.29,3294.29 v1(5334.65,3294.29)
OSC1: C3.2 U1.8 X1.1 | length 501.7
  Top Layer w10: C3.2 4743.52,3146.24 X1.1 4725.3,3179.23 4665.35,3239.17 4665.35,3369.09 4750.59,3454.33 U1.8
OSC2: C4.2 U1.7 X1.3 | length 424
  Top Layer w10: U1.7 4866.73,3504.33 4901,3470.06 X1.3 4985.14,3273.72 C4.2
R\S\T\: P1.31 R2.1 U1.17 | length 801.8
  Top Layer w10: U1.17 5322.24,3754.33 R2.1 5538.39,3794.29 5624.02,3879.92 5624.02,4006.89 5633.5,4016.38 5728.11,4016.38 P1.31
RX_CAN: U1.2 U2.4 | length 617.9
  Top Layer w10: U2.4 4339.37,3592.72 4385.47,3546.61 4503.31,3546.61 4711.02,3754.33 U1.2
RXD: P1.10 P5.3 | length 1934.8
  Bottom Layer w10: P1.10 4672.64,4056.69 4723.43,4005.91 4723.43,3768.7 4779.17,3712.95 5441.77,3712.95 5442.4,3713.58 5963.58,3713.58 6000.98,3676.18 6114.17,3676.18 6142.72,3647.64 6142.72,3580.71 P5.3
SCK: P1.23 U1.13 | length 943.3
  Top Layer w10: U1.13 5075.59,3554.33 5020.67,3609.25 5020.67,3997.05 5043.31,4019.68 5324.8,4019.68 P1.23
SCL: P1.5 P4.3 | length 2404.7
  Bottom Layer w10: P1.5 4453.74,3952.95 4453.74,3696.96 4607.83,3542.87 5775.24,3542.87 5972.64,3345.47 6171.26,3345.47 P4.3
SDA: P1.3 P4.2 | length 2733.6
  Bottom Layer w10: P1.3 4422.3,3922.18 4422.3,3685.96 4591.54,3516.73 5741.14,3516.73 5943.9,3313.98 6315.94,3313.98 6415.35,3413.39 6415.35,3565.94 P4.2
SOLAR1: P2.4
SOLAR2: P2.5
T\X\0\: R1.1 U1.4 U1.5 U1.6 | length 946.1
  Top Layer w10: R1.1 4857.28,3853.35 4894.69,3815.94 4894.69,3678.15 4870.87,3654.33 ; U1.6 4856.5,3554.33 4870.87,3568.7 4870.87,3611.02 ; U1.5 4864.17,3604.33 4870.87,3611.02 ; U1.4 4870.87,3654.33 ; 4870.87,3611.02 4870.87,3654.33
TX_CAN: U1.1 U2.1 | length 400.2
  Top Layer w10: U2.1 4489.37,3691.14 4602.56,3804.33 U1.1
TXD: P1.8 P5.2 | length 1823.9
  Bottom Layer w10: P1.8 4572.64,4055.71 4622.05,4006.3 4622.05,3833.66 4764.76,3690.94 5827.17,3690.94 5904.53,3613.58 6077.17,3613.58 P5.2
pads on no net: P1.7 P1.11 P1.12 P1.13 P1.15 P1.16 P1.17 P1.18 P1.22 P1.26 P1.27 P1.28 P1.32 P1.33 P1.35 P1.36 P1.37 P1.38 P1.40 P2. U1.3 U1.10 U1.11 U2.5

## Polygon pours and split planes (outlines as drawn)
GND on Bottom Layer "GND_B" (solid, remove dead copper, pour order 32): 3942.2,2390.75 ccw(c4060.31,2390.75) 4060.31,2272.64 4633.86,2272.64 ccw(c4633.86,2390.75) 4751.97,2390.75 4751.97,2859.25 cw(c4870.08,2859.25) 4870.08,2977.36 4870.08,2977.2 6383.15,2977.2 ccw(c6383.15,3095.32) 6501.26,3095.32 6501.26,4040.2 ccw(c6383.15,4040.2) 6383.15,4158.31 4060.31,4158.31 ccw(c4060.31,4040.2) 3942.2,4040.2
GND on Top Layer "GND_T" (solid, pour order 33): 3942.2,2390.75 ccw(c4060.31,2390.75) 4060.31,2272.64 4633.86,2272.64 ccw(c4633.86,2390.75) 4751.97,2390.75 4751.97,2859.25 cw(c4870.08,2859.25) 4870.08,2977.36 4870.08,2977.2 6383.15,2977.2 ccw(c6383.15,3095.32) 6501.26,3095.32 6501.26,4040.2 ccw(c6383.15,4040.2) 6383.15,4158.31 4060.31,4158.31 ccw(c4060.31,4040.2) 3942.2,4040.2

## Keep-outs
Keep-Out Layer:
  lines w7.87: 4060.31,4158.31 ccw(c4060.31,4040.2) 3942.2,4040.2 3942.2,2390.75 ccw(c4060.31,2390.75) 4060.31,2272.64 4633.86,2272.64 ; 4060.31,4158.31 4060.31,4158.31 ; 4060.31,4158.31 6383.15,4158.31 cw(c6383.15,4040.2) 6501.26,4040.2 6501.26,3095.32 cw(c6383.15,3095.32) 6383.15,2977.2 4870.08,2977.2 4870.08,2977.36 ccw(c4870.08,2859.25) 4751.97,2859.25 4751.97,2390.75 ; 4633.86,2272.64 ccw(c4633.86,2390.75) 4751.97,2390.75 ; 4633.86,2272.64 4633.86,2272.64 ; 4751.97,2390.75 4751.97,2390.75

## Other copper
Top Layer:
  pour cut-out: 3942.2,4040.2 3942.2,3103.35 4068.35,3103.35 4080,3115 4080,4020.51 4060.31,4040.2
Bottom Layer:
  pour cut-out: 3942.2,4040.2 3942.2,3103.35 4068.35,3103.35 4080,3115 4080,4020.51 4060.31,4040.2

## Silkscreen, mask and mechanical layers (free items; w line width, h text height)
Top Overlay:
  text "UART" at 6021.65,3833.66 h47.24
  text "I2C" at 6315.94,3830.71 h47.24
  text "OKI-78SR-5/1.5-W36H-C" at 5662.4,3421.26 h47.24 r90
  text "OUT" at 5421.26,3348.43 h47.24
  text "GND" at 5568.9,3347.44 h47.24
  text "IN" at 5735.24,3346.46 h47.24
  text "irnas.eu" at 4049.21,3291.73 h70.87 r90
  text "CAN" at 4432.09,3125.93 h39.37
  text "VIN" at 5058.07,3115.16 h59.06
  text "L" at 4307.09,3029.53 h39.37
  text "H" at 4594.49,3028.54 h39.37
  text "GND" at 5057.09,3005.91 h59.06
Bottom Overlay:
  text "irnas.eu" at 5174.21,3634.84 h70.87
  text "RPi-CAN-HAT" at 5190.94,3521.65 h70.87
  text "v0.1" at 5187.01,3392.72 h70.87
Mechanical 1:
  lines w3.94: 4870.08,2977.2 6383.15,2977.2 ccw(c6383.15,3095.32) 6501.26,3095.32 6501.26,4040.2 ccw(c6383.15,4040.2) 6383.15,4158.31 4060.31,4158.31 ccw(c4060.31,4040.2) 3942.2,4040.2 3942.2,2390.75 ccw(c4060.31,2390.75) 4060.31,2272.64 4633.86,2272.64 ccw(c4633.86,2390.75) 4751.97,2390.75 4751.97,2859.25 cw(c4870.08,2859.25) 4870.08,2977.36
Mechanical 3:
  circle w7.87: c4080,4020.51 r117.95
  circle w7.87: c4080,3115 r118.93
  circle w7.87: c6363.46,4020.51 r117.22
  circle w7.87: c6363.46,3115 r117.83
  lines w3.94: 6389.06,2977.2 4060.31,2977.2 cw(c4060.31,3095.32) 3942.2,3095.32 3942.2,4040.2 cw(c4060.31,4040.2) 4060.31,4158.31 6383.15,4158.31 cw(c6383.15,4040.2) 6501.26,4040.2 6501.26,3095.32
  lines w7.87: 4222.44,3922.24 4222.44,4122.05 6222.44,4122.05 6222.44,3922.24 4222.44,3922.24 ; 5449.8,3009.84 5648.62,3009.84 5649.61,3010.83 5649.61,3110.24 5449.8,3110.24 5449.8,3009.84 ; 5667.32,3009.84 5868.11,3009.84 5868.11,3110.24 5667.32,3110.24 5667.32,3009.84

## Dimensions
3942.2,4040.2 to 6501.26,4040.2 on Mechanical 1
4060.31,4158.31 to 4060.31,2272.64 on Mechanical 1